# EAGLE board HW4_SCHEMATIC (EAGLE 9.6.2)
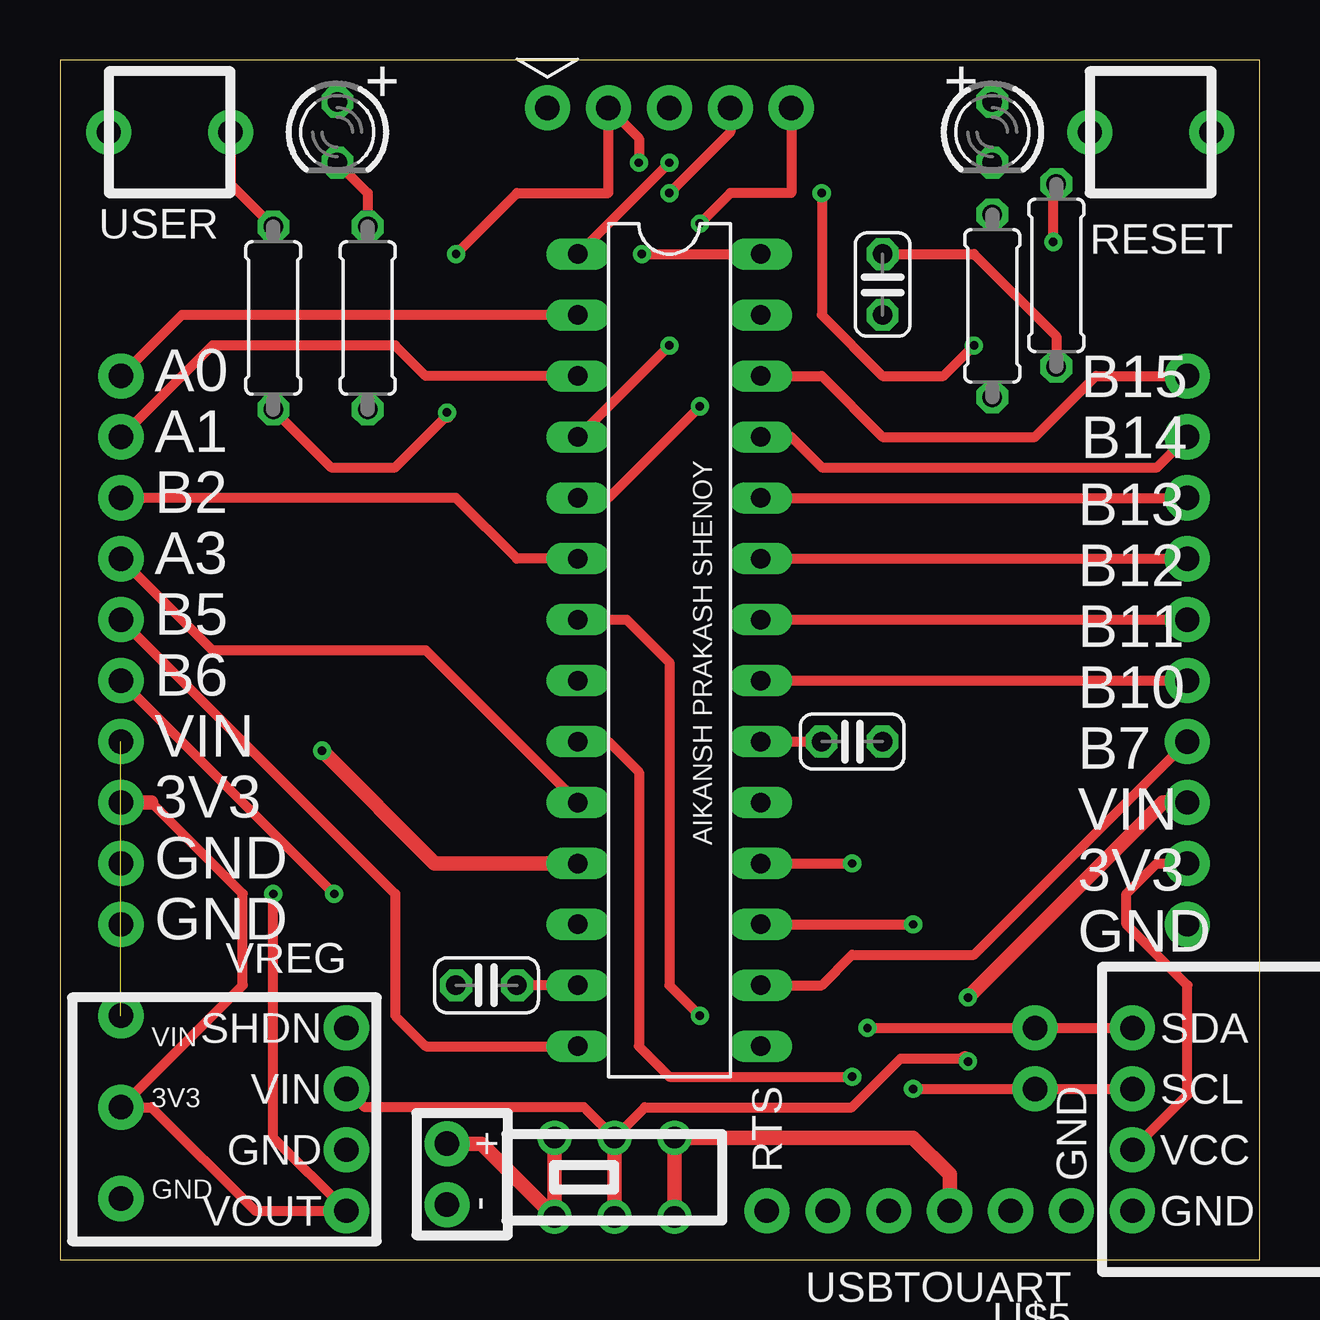
[diagram p0: board, top side]
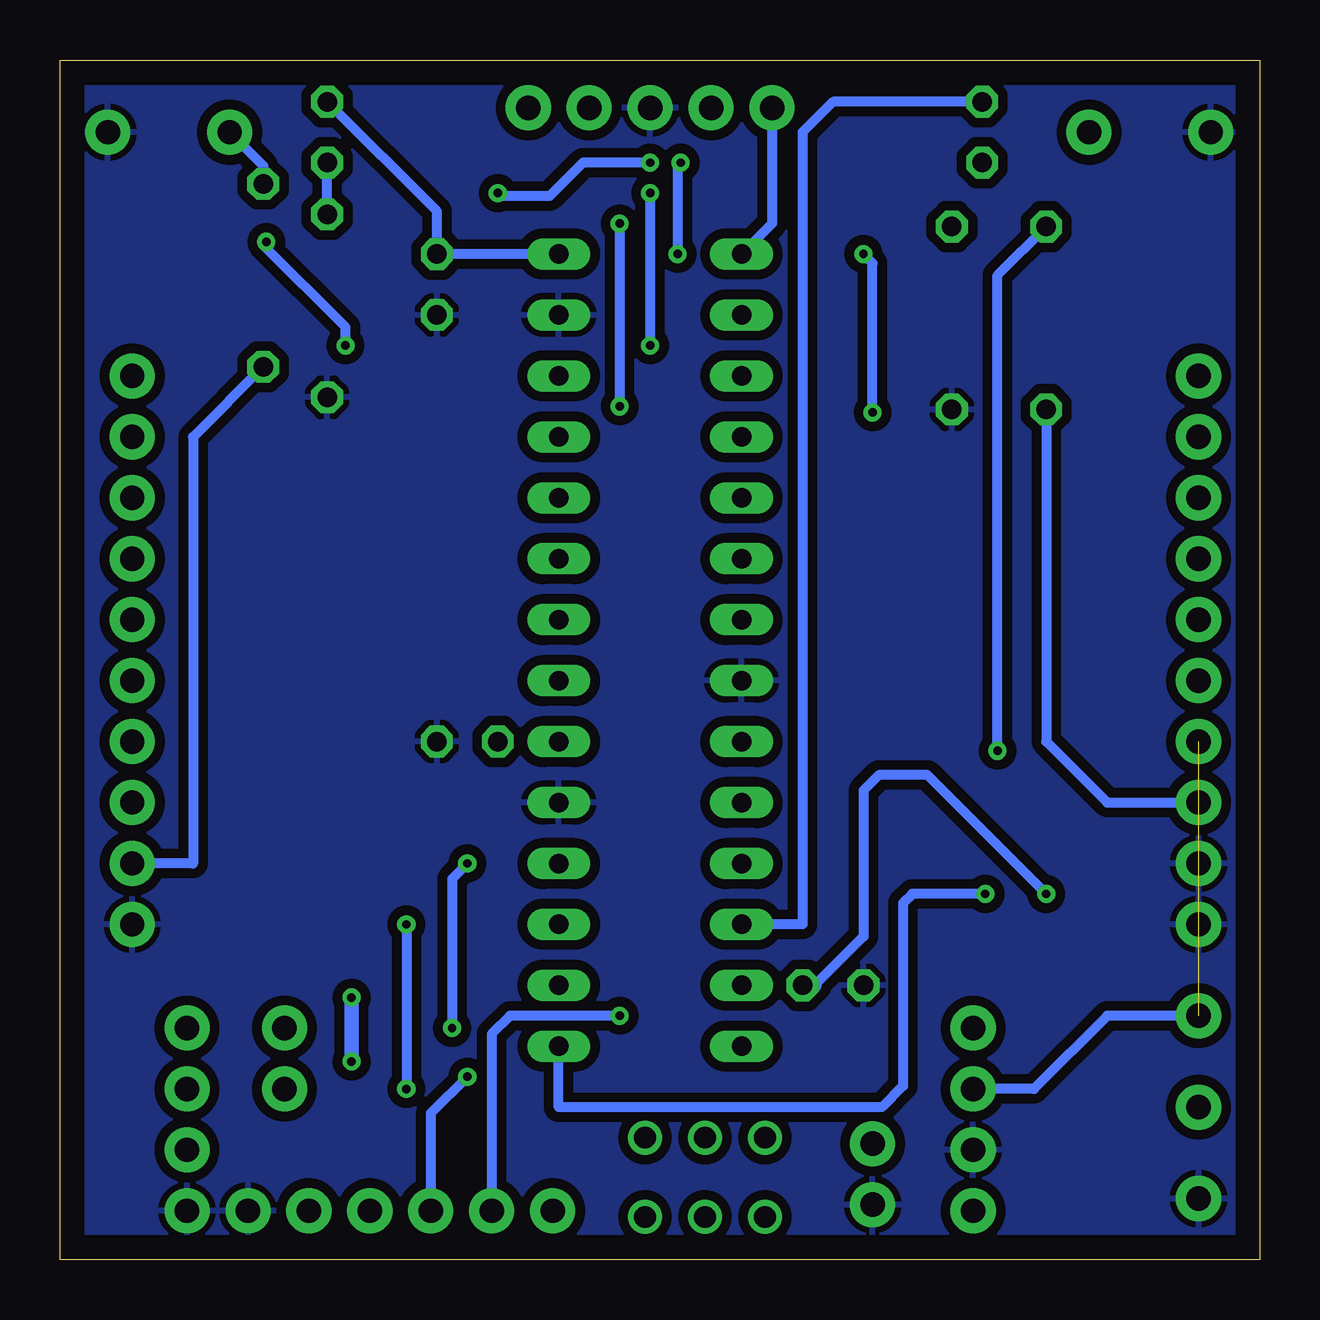
[diagram p1: board, bottom side, seen from below]

Size 50 x 50 mm. Coordinates in mm from the lower left corner, seen from the top.
Outline: 0,0 50,0 50,50 0,50 0,0
Copper layers (1*16): Top 0.035mm / dielectric 1.5mm / Bottom 0.035mm
Design rules "default": minimum track width 6mil, minimum drill 0.35mm, track to track 6mil, track to pad 6mil, pad to pad 6mil, via to via 6mil, smd to smd 6mil, copper to edge 40mil, drill to drill 6mil, minimum pad ring 10mil, minimum via ring 8mil, stop-mask expansion 4mil, vias tented up to drill 0mil, thermal gap 10mil

## Footprints (pad centres in the part's own frame; a part is rotated, then mirrored left to right if it is on the bottom)
C025-024X044 = drill 0.813 octagon: 1 -1.27,0; 2 1.27,0
LED3MM = drill 0.813 octagon: A -1.27,0; K 1.27,0
0207/7 = drill 0.813 octagon: 1 -3.81,0; 2 3.81,0
DIL28-3 = drill 0.813 long: 1 -16.51,-3.81; 2 -13.97,-3.81; 3 -11.43,-3.81; 4 -8.89,-3.81; 5 -6.35,-3.81; 6 -3.81,-3.81; 7 -1.27,-3.81; 8 1.27,-3.81; 9 3.81,-3.81; 10 6.35,-3.81; 11 8.89,-3.81; 12 11.43,-3.81; 13 13.97,-3.81; 14 16.51,-3.81; 15 16.51,3.81; 16 13.97,3.81; 17 11.43,3.81; 18 8.89,3.81; 19 6.35,3.81; 20 3.81,3.81; 21 1.27,3.81; 22 -1.27,3.81; 23 -3.81,3.81; 24 -6.35,3.81; 25 -8.89,3.81; 26 -11.43,3.81; 27 -13.97,3.81; 28 -16.51,3.81
BAT = drill 1.016 pad 1.88: 1 -1.27,0; 2 1.27,0
SLIDE = drill 0.9: 1 -2.5,-1.65; 2 0,-1.65; 3 2.5,-1.65; 4 2.5,1.65; 5 0,1.65; 6 -2.5,1.65
VREG = drill 1.016 pad 1.88: 1 -3.81,0; 2 -1.27,0; 3 1.27,0; 4 3.81,0
USBTOUART = drill 1.016 pad 1.88: 1 -6.35,0; 2 -3.81,0; 3 -1.27,0; 4 1.27,0; 5 3.81,0; 6 6.35,0
SNAP = drill 1.016 pad 1.88: 1 -5.08,0; 2 -2.54,0; 3 0,0; 4 2.54,0; 5 5.08,0
DISPLAY = drill 1.016 pad 1.88: 1 0,-3.81; 2 0,-1.27; 3 0,1.27; 4 0,3.81
BUTTON = drill 1.016 pad 1.88: 1 -2.54,0; 3 2.54,0
ONE = drill 1.016 pad 1.88: 1 0,0
FIVE = drill 1.016 pad 1.88: 1 -5.08,0; 2 -2.54,0; 3 0,0; 4 2.54,0; 5 5.08,0

## Placement (x,y rotation side)
C1  0.1uF  [C025-024X044]  34.29,40.64 270 top
C2  0.1uF  [C025-024X044]  17.78,11.43 180 top
C3  10uF  [C025-024X044]  33.02,21.59 0 top
LED1  RED  [LED3MM]  38.86,46.99 270 top
LED2  GREEN  [LED3MM]  11.56,46.99 270 top
R1  330  [0207/7]  38.86,39.75 90 top
R2  330  [0207/7]  12.83,39.24 90 top
R3  10K  [0207/7]  41.53,41.02 270 top
R4  10K  [0207/7]  8.89,39.24 270 top
U$1  PIC32  [DIL28-3]  25.4,25.4 270 top
U$2  BAT  [BAT]  16.13,3.56 90 top
U$3  SLIDE  [SLIDE]  23.11,3.43 0 top
U$4  VREG  [VREG]  11.94,5.84 90 top
U$5  USBTOUART  [USBTOUART]  35.81,2.03 180 top
U$6  SNAP  [SNAP]  25.4,48.01 0 top
U$7  DISPLAY  [DISPLAY]  44.7,5.84 0 top
U$8  RESET  [BUTTON]  45.47,46.99 0 top
U$9  USER  [BUTTON]  4.57,46.99 180 top
U$10  ONE  [ONE]  40.64,9.65 0 top
U$11  ONE  [ONE]  40.64,7.11 0 top
U$12  FIVE  [FIVE]  46.99,31.75 90 top
U$13  FIVE  [FIVE]  46.99,19.05 90 top
U$14  FIVE  [FIVE]  2.54,19.05 90 top
U$15  FIVE  [FIVE]  2.54,31.75 90 top
U$16  ONE  [ONE]  2.54,10.16 0 top
U$17  ONE  [ONE]  2.54,6.35 0 top
U$18  ONE  [ONE]  2.54,2.54 0 top

## Library data of the parts
C1-C3 = HW4_LIBRARY; SPICEPREFIX: C
LED1 LED2 U$1-U$18 = HW4_LIBRARY
R1-R4 = HW4_LIBRARY; SPICEPREFIX: R

## Nets
+3V3: C1.1 C2.1 LED1.A R3.2 R4.2 U$1.13 U$1.28 U$4.1 U$6.2 U$7.2 U$13.2 U$14.3 U$17.1
+5V: U$3.3 U$3.4 U$5.3
A0: U$1.2 U$15.5
A1: U$1.3 U$15.4
A3: U$1.10 U$15.2
A4: LED2.A U$1.12
B2: U$1.6 U$15.3
B4: R4.1 U$1.11 U$9.1
B5: U$1.14 U$15.1
B6: U$1.15 U$14.5
B7: U$1.16 U$13.4
B10: U$1.21 U$13.5
B11: U$1.22 U$12.1
B12: U$1.23 U$12.2
B13: U$1.24 U$12.3
B14: U$1.25 U$12.4
B15: U$1.26 U$12.5
GND: C1.2 C2.2 C3.2 R1.1 R2.1 U$1.8 U$1.19 U$1.27 U$2.1 U$4.2 U$5.1 U$6.3 U$7.1 U$8.3 U$9.3 U$13.1 U$14.1 U$14.2 U$18.1
MCLR: R3.1 U$1.1 U$6.1 U$8.1
N$2: U$2.2 U$3.1 U$3.6
N$4: LED2.K R2.2
N$5: LED1.K R1.2
N$6: C3.1 U$1.20
PGC: U$1.5 U$6.5
PGD: U$1.4 U$6.4
SCL: U$1.17 U$7.3 U$11.1
SDA: U$1.18 U$7.4 U$10.1
U1RX: U$1.9 U$5.4
U1TX: U$1.7 U$5.5
VIN: U$3.2 U$3.5 U$4.3 U$13.3 U$14.4 U$16.1

## Tracks (layer width: path | path; a pad name or v marks a point on that pad's centre or on a via)
+3V3  (via drill 0.35)
  Top 0.406: U$1.13 C2.1 | C1.1 38.1,41.91 41.53,38.48 R3.2 | U$7.2 46.99,6.86 46.99,11.43 44.45,13.97 44.45,15.24 45.72,16.51 U$13.2 | R4.2 11.3,33.02 13.97,33.02 16.13,35.18 | v16.51,41.91 19.05,44.45 22.86,44.45 U$6.2 24.13,46.74 v24.13,45.72 | 3.81,19.05 7.62,15.24 7.62,11.43 U$17.1 3.81,6.35 8.13,2.03 U$4.1 8.89,5.08 v8.89,15.24 | v24.26,41.91 U$1.28
  Top 0.61: 16.13,35.18 v16.13,35.31 | 3.81,19.05 U$14.3
  Bottom 0.406: U$1.28 C1.1 34.29,43.69 LED1.A | R3.2 44.45,34.29 44.45,16.51 U$13.2 | R4.2 8.89,21.59 6.35,19.05 U$14.3 | v16.13,35.31 16.13,41.53 v16.51,41.91 | v8.89,15.24 13.84,20.19 15.88,20.19 16.51,19.56 16.51,13.46 18.54,11.43 | v24.13,45.72 24.26,45.59 v24.26,41.91
  Bottom 0.61: 18.54,11.43 C2.1
+5V
  Top 0.61: U$3.3 U$3.4 35.56,5.08 37.08,3.56 U$5.3
A0
  Top 0.406: U$15.5 5.08,39.37 U$1.2
A1
  Top 0.406: U$1.3 15.24,36.83 13.97,38.1 6.35,38.1 U$15.4
A3
  Top 0.406: U$15.2 6.35,25.4 15.24,25.4 U$1.10
A4
  Bottom 0.406: LED2.A 17.78,48.26 19.05,46.99 19.05,13.97 U$1.12
B2
  Top 0.406: U$1.6 19.05,29.21 16.51,31.75 U$15.3
B4  (via drill 0.35)
  Top 0.406: R4.1 7.11,44.83 U$9.1
  Top 0.61: U$1.11 15.62,16.51 v10.92,21.21
  Bottom 0.406: R4.1 10.92,41.02 v10.92,21.21
B5
  Top 0.406: U$15.1 13.97,15.24 13.97,10.16 15.24,8.89 U$1.14
B6  (via drill 0.35)
  Top 0.406: U$14.5 v11.43,15.24
  Bottom 0.406: v11.43,15.24 14.48,15.24 14.86,14.86 14.86,7.24 15.75,6.35 29.21,6.35 U$1.15
B7
  Top 0.406: U$1.16 31.75,11.43 33.02,12.7 38.1,12.7 U$13.4
B10
  Top 0.406: U$1.21 U$13.5
B11
  Top 0.406: U$1.22 U$12.1
B12
  Top 0.406: U$1.23 U$12.2
B13
  Top 0.406: U$1.24 U$12.3
B14
  Top 0.406: U$1.25 30.48,34.29 31.75,33.02 45.72,33.02 U$12.4
B15
  Top 0.406: U$1.26 31.75,36.83 34.29,34.29 40.64,34.29 43.18,36.83 U$12.5
GND
  pour Bottom (isolate 0.406): 0,0 50.8,0 50.8,50.8 49.53,50.8 0,50.8 0,49.53
MCLR  (via drill 0.35)
  Top 0.406: U$1.1 v25.4,45.72 | v31.75,44.45 31.75,39.37 34.29,36.83 36.83,36.83 v38.1,38.1 | v41.4,42.42 41.4,44.7 R3.1
  Bottom 0.406: U$8.1 41.53,45.59 R3.1 | U$6.1 20.32,43.18 U$1.1 | v38.1,38.1 38.1,38.86 41.53,42.29 v41.4,42.42 | v25.4,45.72 28.19,45.72 29.59,44.32 31.62,44.32 v31.75,44.45
N$2
  Top 0.61: U$3.6 U$3.1 17.57,4.83 U$2.2
N$4
  Top 0.406: LED2.K 12.83,44.45 R2.2
N$5
  Bottom 0.406: R1.2 LED1.K
N$6
  Top 0.406: U$1.20 C3.1
PGC  (via drill 0.35)
  Top 0.406: U$6.5 30.48,44.45 27.94,44.45 v26.67,43.18 | v26.67,35.56 22.86,31.75 U$1.5
  Bottom 0.406: v26.67,43.18 v26.67,35.56
PGD  (via drill 0.35)
  Top 0.406: U$6.4 27.94,46.99 v25.4,44.45 | v25.4,38.1 U$1.4
  Bottom 0.406: v25.4,44.45 25.4,43.18 v25.4,38.1
SCL  (via drill 0.35)
  Top 0.406: U$1.17 v35.56,13.97 | v35.56,7.11 U$11.1 U$7.3
  Bottom 0.406: v35.56,13.97 v35.56,7.11
SDA  (via drill 0.35)
  Top 0.406: U$1.18 v33.02,16.51 | v33.66,9.65 U$10.1 U$7.4
  Bottom 0.406: v33.02,16.51 33.66,15.88 v33.66,9.65
U1RX  (via drill 0.35)
  Top 0.406: U$1.9 22.86,21.59 24.13,20.32 24.13,8.89 25.4,7.62 v33.02,7.62
  Bottom 0.406: v33.02,7.62 34.54,6.1 U$5.4
U1TX  (via drill 0.35)
  Top 0.406: v26.67,10.16 25.4,11.43 25.4,24.89 23.62,26.67 U$1.7
  Bottom 0.406: v26.67,10.16 31.24,10.16 32,9.4 U$5.5
VIN  (via drill 0.35)  (1 unrouted)
  Top 0.406: U$4.3 12.7,6.35 21.84,6.35 U$3.5 24.39,6.35 33.02,6.35 35.05,8.38 37.72,8.38
  Top 0.61: U$3.5 U$3.2 | 37.72,8.38 v37.85,8.26 | v37.85,10.92 45.97,19.05 U$13.3
  Bottom 0.406: U$16.1 6.35,10.16 9.4,7.11 U$4.3
  Bottom 0.61: v37.85,8.26 v37.85,10.92

## Text on the board
tPlace: + | + | A0 | B15 | A1 | B14 | B2 | B13 | A3 | B12 | B5 | B11 | B6 | B10 | VIN | B7 | 3V3 | VIN | AIKANSH PRAKASH SHENOY | GND | 3V3 | GND | GND | VIN | 3V3 | GND